# EAGLE board PasswordPumpRotary (EAGLE 7.5.0)
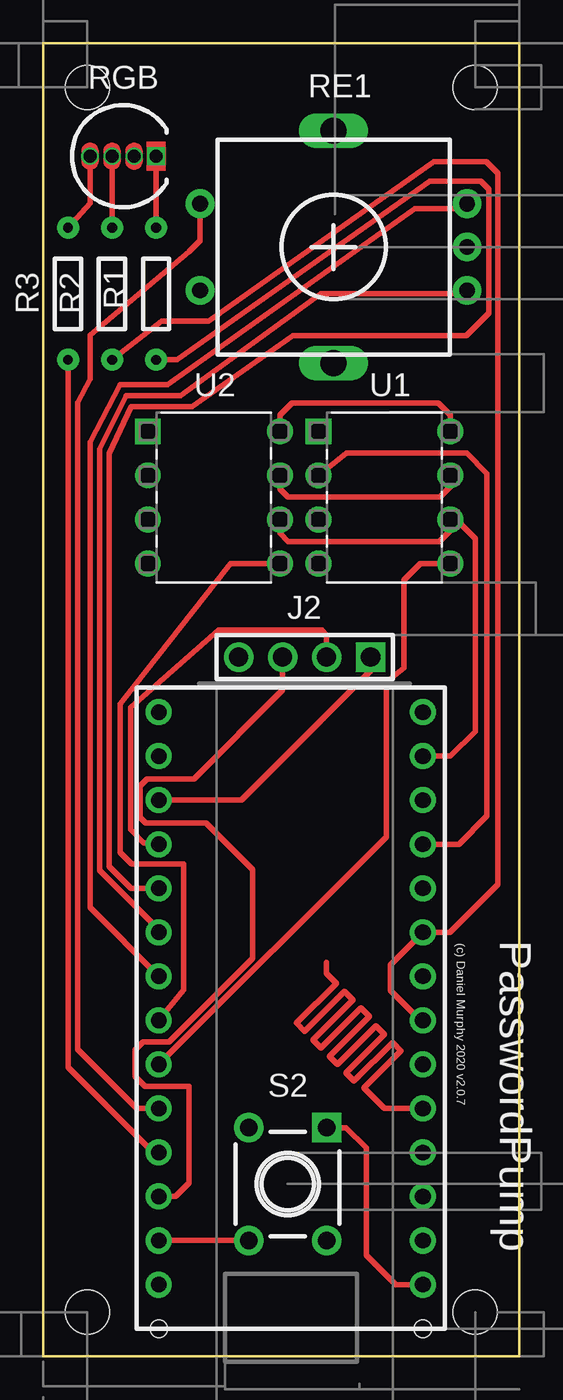
[diagram p0: board, top side]
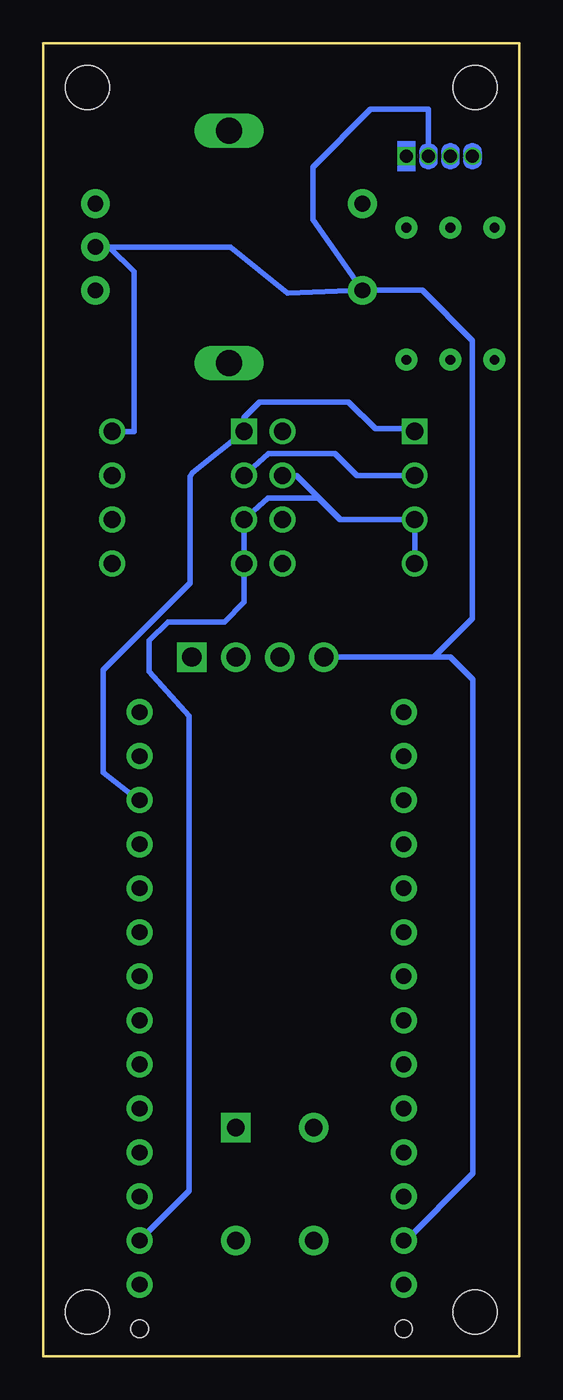
[diagram p1: board, bottom side, seen from below]

Size 27.46 x 75.72 mm. Coordinates in mm from the lower left corner, seen from the top.
Outline: 0,75.72 27.46,75.72 27.46,0 0,0 0,75.72
Copper layers (1*16): Top 0.035mm / dielectric 1.5mm / Bottom 0.035mm
Design rules "default *": minimum track width 10mil, minimum drill 0.61mm, track to track 8mil, track to pad 8mil, pad to pad 8mil, via to via 8mil, smd to smd 8mil, copper to edge 40mil, drill to drill 8mil, minimum pad ring 0mil, minimum via ring 8mil, stop-mask expansion 4mil, vias tented up to drill 19mil, thermal gap 10mil
Net classes: 0 Default: width 0.33 mm, clearance 0.33 mm
Holes 2.54 mm at 24.92,73.18 2.54,73.18 2.54,2.54 24.92,2.54
Holes 0.99 mm at 6.67,1.59 21.91,1.59

## Footprints (pad centres in the part's own frame; a part is rotated, then mirrored left to right if it is on the bottom)
HDR-1x4T/2.54/10x2 = drill 1.1 pad 1.7 square: 1 -3.81,0 | drill 1.1 pad 1.7: 2 -1.27,0; 3 1.27,0; 4 3.81,0
PAD0 = drill 0.9 pad 1.5: RAW 0,0
RES-7.62/4x1.5 = drill 0.559 pad 1.27: 1 -3.81,0; 2 3.81,0
PEC11R-4000K-S = drill 0.9 pad 1.65: 1 -2.5,7.7; 2 2.5,7.7; 3 -2.5,-7.7; 4 0,-7.7; 5 2.5,-7.7 | drill 1.5 pad 2 long: 6 -6.7,0; 7 6.7,0
LED(TRI)-5R = drill 0.75 pad 1.05 square: 1 -1.905,0 | drill 0.75 pad 1: 2 -0.635,0; 3 0.635,0; 4 1.905,0
B3F-1 = drill 1 pad 1.7 square: 1 -3.25,2.25 | drill 1 pad 1.7: 2 3.25,2.25; 3 -3.25,-2.25; 4 3.25,-2.25
DIP254P762X432-8 = drill 0.991 pad 1.486 square: 1 -7.62,7.62 | drill 0.991 pad 1.486: 2 -7.62,5.08; 3 -7.62,2.54; 4 -7.62,0; 5 0,0; 6 0,2.54; 7 0,5.08; 8 0,7.62

## Placement (x,y rotation side)
J2  644456-4  [HDR-1x4T/2.54/10x2]  15.08,40.32 180 top
PAD1  DEV_PAD1  [PAD0]  6.67,4.13 90 top
PAD2  DEV_PAD2  [PAD0]  6.67,6.67 90 top
PAD3  DEV_PAD3  [PAD0]  6.67,9.21 90 top
PAD4  DEV_PAD4  [PAD0]  6.67,11.75 90 top
PAD5  DEV_PAD5  [PAD0]  6.67,14.29 90 top
PAD6  DEV_PAD6  [PAD0]  6.67,16.83 90 top
PAD7  DEV_PAD7  [PAD0]  6.67,19.37 90 top
PAD8  DEV_PAD8  [PAD0]  6.67,21.91 90 top
PAD9  DEV_PAD9  [PAD0]  6.67,24.45 90 top
PAD10  DEV_PAD10  [PAD0]  6.67,26.99 90 top
PAD11  DEV_PAD11  [PAD0]  6.67,29.53 90 top
PAD12  DEV_PAD12  [PAD0]  6.67,32.07 90 top
PAD13  DEV_PAD13  [PAD0]  21.91,4.13 90 top
PAD14  DEV_PAD14  [PAD0]  21.91,6.67 90 top
PAD15  DEV_PAD15  [PAD0]  21.91,9.21 90 top
PAD16  DEV_PAD16  [PAD0]  21.91,11.75 90 top
PAD17  DEV_PAD17  [PAD0]  21.91,14.29 90 top
PAD18  DEV_PAD18  [PAD0]  21.91,16.83 90 top
PAD19  DEV_PAD19  [PAD0]  21.91,19.37 90 top
PAD20  DEV_PAD20  [PAD0]  21.91,21.91 90 top
PAD21  DEV_PAD21  [PAD0]  21.91,24.45 90 top
PAD22  DEV_PAD22  [PAD0]  21.91,26.99 90 top
PAD23  DEV_PAD23  [PAD0]  21.91,29.53 90 top
PAD24  DEV_PAD24  [PAD0]  21.91,32.07 90 top
PAD25  DEV_PAD25  [PAD0]  6.67,34.61 90 top
PAD26  DEV_PAD26  [PAD0]  6.67,37.15 90 top
PAD27  DEV_PAD27  [PAD0]  21.91,34.61 90 top
PAD28  DEV_PAD28  [PAD0]  21.91,37.15 90 top
R1  220  [RES-7.62/4x1.5]  6.51,61.28 90 top
R2  220  [RES-7.62/4x1.5]  3.97,61.28 90 top
R3  220  [RES-7.62/4x1.5]  1.43,61.28 90 top
RE1  PEC11R  [PEC11R-4000K-S]  16.75,63.98 90 top
RGB  5mm Round Tri-Color  [LED(TRI)-5R]  4.6,69.22 180 top
S2  B3F-1000  [B3F-1]  14.1,9.93 270 top
U1  24LC512-I_P  [DIP254P762X432-8]  23.49,45.72 0 top
U2  24LC512-I_P  [DIP254P762X432-8]  13.65,45.72 0 top

## Library data of the parts
J2 = common; DATASHEET: http://datasheets.diptrace.com/con_headers/ENG_CD_644456_D2.pdf; MANUFACTURER: TE Connectivity
PAD1-PAD28 R1-R3 = common
RE1 = common; DATASHEET: http://www.bourns.com/docs/Product-Datasheets/pec11R.pdf; MANUFACTURER: Bourns
RGB = common; DATASHEET: http://datasheets.diptrace.com/sensors_led/WP154A4SUREQBFZGC.pdf; MANUFACTURER: Kingbright
S2 = common; DATASHEET: http://datasheets.diptrace.com/switches/B3F_1110.pdf; MANUFACTURER: OMRON
U1 U2 = common; ALLIED_NUMBER: 70045250; ALLIED_PRICE/STOCK: https://www.alliedelec.com/microchip-technology-inc-24lc512-i-p/70045250/; ARROW_PART_NUMBER: 24LC512-I/P; ARROW_PRICE/STOCK: https://www.arrow.com/en/products/24lc512-ip/microchip-technology; DATASHEET_LINK: http://componentsearchengine.com/Datasheets/1/24LC512-I_P.pdf; DESCRIPTION: 512K I2C CMOS Serial EEPROM; MANUFACTURER_NAME: Microchip; MANUFACTURER_PART_NUMBER: 24LC512-I/P; RS_PART_NUMBER: 0454191; RS_PRICE/STOCK: http://uk.rs-online.com/web/p/products/0454191

## Nets
Net_0: PAD4.VCC R3.1
Net_1: J2.2 PAD11.MOSI (16)
Net_2: PAD14.RX (0) U1.3 U1.4 U1.7 U2.3 U2.4 U2.7
Net_3: R3.2 RGB.4
Net_4: R2.2 RGB.3
Net_5: R1.2 RGB.1
Net_6: J2.4 PAD2.GND3 RE1.1 RE1.4 RGB.2 S2.4 U1.8 U2.8
Net_8: PAD17.SDA (2)
Net_9: PAD5.A3 (21) RE1.2
Net_10: PAD6.A2 (20) U1.5
Net_11: PAD7.A1 (19) U2.5
Net_12: PAD9.SCLK (15) RE1.3
Net_13: PAD8.A0 (18) RE1.5
Net_15: PAD13.TX (1) S2.1
Net_16: PAD10.MISO (14) R1.1
Net_17: PAD27.A8 (8) U1.6 U2.6
Net_18: J2.1 PAD12.A10 (10)
Net_19: PAD19.A6 (4) PAD21.A7 (6) R2.1
Net_20: PAD23.A8 (8) U1.2 U2.2
Net_21: PAD24.A9 (9) U1.1 U2.1
Net_22: J2.3 PAD3.RST

## Tracks (layer width: path | path; a pad name or v marks a point on that pad's centre or on a via)
Net_0
  Top 0.33: 6.67,11.75 6.35,11.75 1.43,16.67 R3.1
Net_1
  Top 0.33: 6.67,29.53 | 6.67,29.53 6.99,29.61 5.79,29.61 5.03,30.38 5.03,37.42 10.12,41.87 16.07,41.87 16.35,41.59 J2.2
Net_2
  Top 0.33: U2.7 13.65,50.01 14.11,49.55 22.88,49.55 23.5,50.16 U1.7
  Bottom 0.33: U2.3 10.35,48.26 11.59,49.5 14.48,49.5 U1.3 U1.4 15.88,43.5 17.02,42.36 20.26,42.36 21.35,41.27 21.35,39.48 19.05,36.93 19.05,9.53 21.91,6.67 | U2.3 U2.4 | U2.3 10.32,48.26 12.86,50.8 U2.7
Net_3
  Top 0.33: RGB.4 2.7,66.52 R3.2
Net_4
  Top 0.33: RGB.3 R2.2 | R2.2
Net_5
  Top 0.33: RGB.1 R1.2 | R1.2
Net_6
  Top 0.33: U2.8 13.65,54.29 14.34,54.98 22.81,54.98 23.5,54.29 U1.8 | 6.67,6.67 S2.4
  Bottom 0.33: RE1.1 13.38,61.32 16.67,63.98 RE1.4 23.65,63.98 22.23,62.55 22.23,53.34 U1.8 | RE1.1 5.6,61.48 2.7,58.58 2.7,42.55 4.92,40.32 3.97,40.32 | 3.97,40.32 J2.4 | 6.67,6.67 6.67,6.54 2.68,10.53 2.68,39.03 3.97,40.32 | RGB.2 5.24,71.91 8.57,71.91 11.91,68.58 11.91,65.56 RE1.1
Net_8
  Top 0.33: 21.91,14.29 19.69,14.29 18.49,15.48 20.64,17.62 20.16,18.1 17.94,15.88 17.46,16.35 19.69,18.57 19.21,19.05 16.99,16.83 16.51,17.3 18.81,19.61 18.34,20.08 16.03,17.78 15.56,18.26 17.86,20.56 17.38,21.04 15.08,18.73 14.61,19.21 16.91,21.51 16.35,22.07 16.35,22.7
Net_9
  Top 0.33: 6.67,14.29 5.4,14.29 1.99,17.69 1.99,54.99 2.7,56.34 2.7,58.9 8.42,63.72 9.05,64.34 RE1.2
Net_10
  Top 0.33: 6.67,16.83 19.8,29.96 19.8,38.89 20.8,39.69 20.8,44.77 21.75,45.72 U1.5
Net_11
  Top 0.33: 6.67,19.37 8.1,21.11 8.1,28.4 5.09,28.4 4.45,29.05 4.45,37.62 10.8,45.72 U2.5
Net_12
  Top 0.33: 6.67,24.45 6.83,24.45 3.25,28.03 3.25,52.31 4.79,55.4 7.93,55.4 16.03,61.28 24.45,61.28 RE1.3
Net_13
  Top 0.33: 6.67,21.91 2.7,25.88 2.7,52.71 4.44,56.04 7.16,56.04 21.43,66.2 24.13,66.2 RE1.5
Net_15
  Top 0.33: S2.1 17.46,13.18 18.63,12.01 18.63,5.82 20.34,4.11 22.01,4.11 21.91,4.13
Net_16
  Top 0.33: 6.67,26.99 5.08,26.99 3.81,28.25 3.81,52.05 5.08,54.77 8.57,54.77 14.41,58.87 24.42,58.87 25.71,60.15 25.71,67.32 25.24,67.79 22.32,67.79 7.71,57.47 R1.1
Net_17
  Top 0.33: U2.6 13.65,47.47 14.12,46.99 22.86,46.99 23.5,47.62 U1.6 23.65,48.42 24.92,47.15 24.92,36.04 23.5,34.61 21.91,34.61
Net_18
  Top 0.33: 6.67,32.07 11.43,32.07 18.89,39.53 J2.1
Net_19
  Top 0.33: R2.1 6.83,59.69 9.53,59.69 22.54,68.9 25.56,68.9 26.22,68.24 26.22,27.22 23.45,24.45 21.91,24.45 20.02,22.57 20.02,21.09 21.43,19.69 21.91,19.37
Net_20
  Top 0.33: 21.91,29.53 23.97,29.53 25.61,31.17 25.61,50.91 24.43,52.09 17.48,52.09 U1.2
  Bottom 0.33: U1.2 14.45,52.06 10.64,52.06 9.37,50.8 U2.2
Net_21
  Bottom 0.33: 21.91,32.07 22.01,32.12 24,33.68 24,39.59 18.99,44.6 18.99,50.73 18.85,50.96 U1.1 15.88,54.13 14.98,55.03 9.84,55.03 8.31,53.5 6.12,53.5 U2.1
Net_22
  Top 0.33: 6.67,9.21 7.62,9.21 8.41,10 8.41,15.57 5.86,15.57 5.3,16.14 5.3,17.68 5.75,18.13 7.25,18.13 12.07,22.95 12.07,28.09 9.39,30.76 5.91,30.76 5.59,31.08 5.59,32.9 6,33.3 8.7,33.3 13.81,38.42 J2.3

## Text on the board
tPlace: PasswordPump | (c) Daniel Murphy 2020 v2.0.7